# EAGLE board v02 (EAGLE 7.0.0)
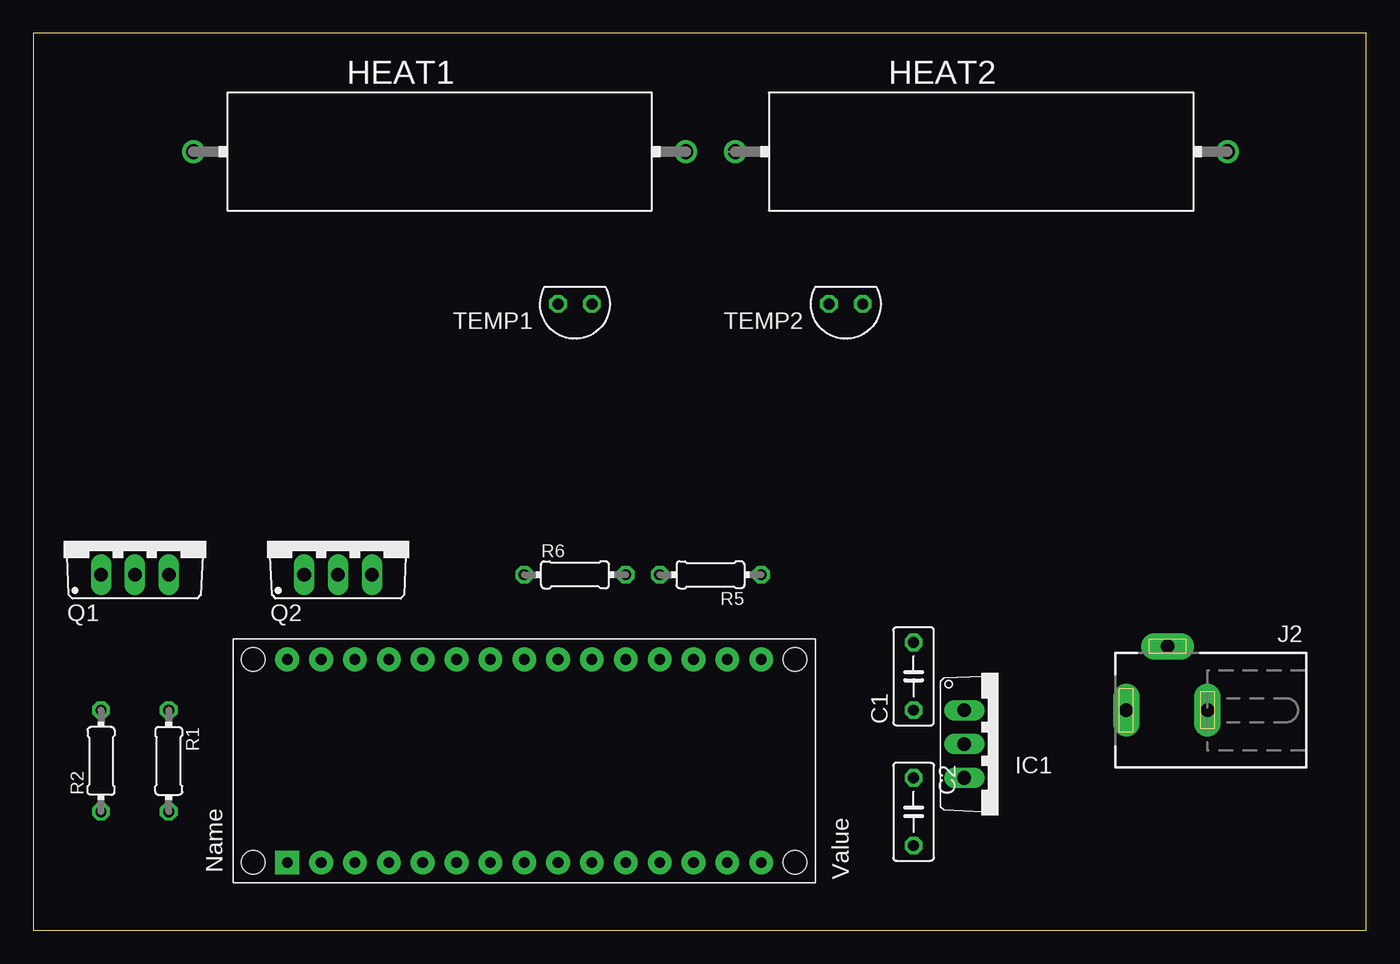
[diagram p0: board, top side]
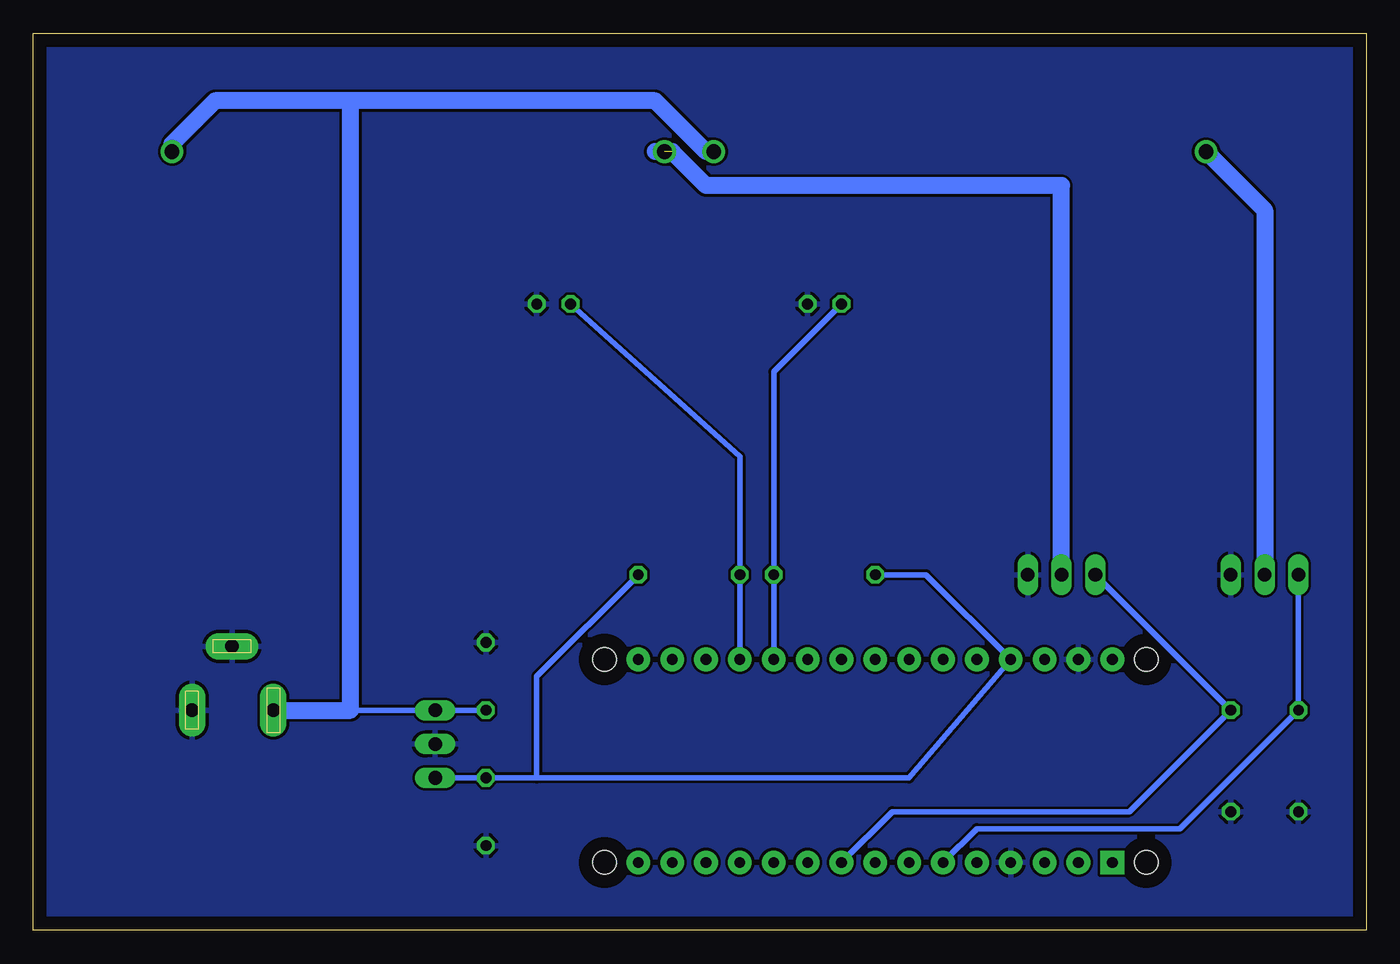
[diagram p1: board, bottom side, seen from below]

Size 100 x 67.3 mm. Coordinates in mm from the lower left corner, seen from the top.
Outline: 0,0 100,0 100,67.3 0,67.3 0,0
Copper layers (1*16): Top 0.035mm / dielectric 1.5mm / Bottom 0.035mm
Design rules "default": minimum track width 10mil, minimum drill 24mil, track to track 8mil, track to pad 8mil, pad to pad 8mil, via to via 8mil, smd to smd 8mil, copper to edge 40mil, drill to drill 8mil, minimum pad ring 10mil, minimum via ring 8mil, stop-mask expansion 4mil, vias tented up to drill 0mil, thermal gap 10mil
Net classes: 1 power: width 0.051 mm

## Footprints (pad centres in the part's own frame; a part is rotated, then mirrored left to right if it is on the bottom)
C050-030X075 = drill 0.813 octagon: 1 -2.54,0; 2 2.54,0
HPS932 = drill 1.1 pad 1.7: 1 -18.47,0; 2 18.47,0
TO220V = drill 1.016 long: 1 -2.54,-2.54; 2 0,-2.54; 3 2.54,-2.54
DCJ0303 = drill 1 pad 2 long: 1 0,3.1; 2 4.8,0; 3 0,-3
TO220BV = drill 1.016 long: D 0,-2.54; G -2.54,-2.54; S 2.54,-2.54
0204/7 = drill 0.813 octagon: 1 -3.81,0; 2 3.81,0
TO92H = drill 0.813 octagon: 1 -1.27,0; 2 1.27,0
PDIP-32 = drill 0.8 pad 1.778: 3V3 15.24,-35.56; +5V 15.24,-10.16; A0 15.24,-12.7; A1 15.24,-15.24; A2 15.24,-17.78; A3 15.24,-20.32; A4 15.24,-22.86; A5 15.24,-25.4; A6 15.24,-27.94; A7 15.24,-30.48; AREF 15.24,-33.02; D0/RX 0,-5.08; D2 0,-12.7; D3 0,-15.24; D4 0,-17.78; D5 0,-20.32; D6 0,-22.86; D7 0,-25.4; D8 0,-27.94; D9 0,-30.48; D10 0,-33.02; D11 0,-35.56; D12 0,-38.1; D13 15.24,-38.1; GND 0,-10.16; GND1 15.24,-5.08; RESET 0,-7.62; RESET1 15.24,-7.62; VIN 15.24,-2.54 | drill 0.8 pad 1.778 square: D1/TX 0,-2.54 | hole 1.778: 0,0; 0,-40.64; 15.24,-40.64; 15.24,0

## Placement (x,y rotation side)
C1  [C050-030X075]  66.04,19.05 90 top
C2  [C050-030X075]  66.04,8.89 270 top
HEAT1  10  [HPS932]  30.48,58.42 0 top
HEAT2  10  [HPS932]  71.12,58.42 0 top
IC1  7805TV  [TO220V]  72.39,13.97 270 top
J2  [DCJ0303]  85.09,16.51 90 top
Q1  IRF740  [TO220BV]  7.62,29.21 0 top
Q2  IRF740  [TO220BV]  22.86,29.21 0 top
R1  10K  [0204/7]  10.16,12.7 270 top
R2  10K  [0204/7]  5.08,12.7 90 top
R5  2K  [0204/7]  50.8,26.67 180 top
R6  2K  [0204/7]  40.64,26.67 0 top
TEMP1  LM335  [TO92H]  40.64,46.99 180 top
TEMP2  LM335  [TO92H]  60.96,46.99 180 top
U$1  [PDIP-32]  16.51,5.08 90 top

## Library data of the parts
C1 C2 R1 R2 R5 R6 = resistor
HEAT1 HEAT2 = resistor-power; OC_FARNELL: unknown; OC_NEWARK: unknown
IC1 = linear
J2 = con-jack; OC_FARNELL: unknown; OC_NEWARK: unknown
Q1 Q2 = transistor-power
TEMP1 TEMP2 = diode
U$1 = jet-lib

## Nets
+5V: C2.1 IC1.3 R5.1 R6.1 U$1.+5V
GND: C1.2 C2.2 IC1.2 J2.2 J2.3 Q1.S Q2.S R1.2 R2.1 TEMP1.1 TEMP2.1 U$1.GND U$1.GND1
H1: Q1.G R2.2 U$1.D3
H2: Q2.G R1.1 U$1.D6
N$6: HEAT1.1 Q1.D
N$9: HEAT2.1 Q2.D
T1: R6.2 TEMP1.2 U$1.A6
T2: R5.2 TEMP2.2 U$1.A7
V+: C1.1 HEAT1.2 HEAT2.2 IC1.1 J2.1

## Tracks (layer width: path | path; a pad name or v marks a point on that pad's centre or on a via)
+5V
  Bottom 0.406: 62.23,11.43 34.29,11.43 U$1.+5V 33.02,26.67 R6.1 | 62.23,11.43 C2.1 IC1.3 | R5.1 62.23,19.05 62.23,11.43
GND
  Bottom 0.406: 88.9,16.51 J2.3
  pour Bottom: -1.27,68.58 -1.27,-1.27 101.6,-1.27 101.6,68.58
H1
  Bottom 0.406: U$1.D3 29.21,7.62 13.97,7.62 R2.2 Q1.G
H2
  Bottom 0.406: U$1.D6 35.56,8.89 17.78,8.89 R1.1 Q2.G
N$6
  Bottom 1.27: HEAT1.1 7.62,54.03 Q1.D
N$9  (1 unrouted)
  Bottom 1.27: Q2.D 22.86,55.88 49.53,55.88 52.07,58.42 53.34,58.42
T1
  Bottom 0.406: U$1.A6 R6.2 44.45,41.91 TEMP1.2
T2
  Bottom 0.406: U$1.A7 R5.2 46.99,35.56 TEMP2.2
V+
  Bottom 0.406: C1.1 IC1.1 76.2,16.51
  Bottom 1.27: HEAT1.2 49.53,58.42 53.34,62.23 76.2,62.23 | 76.2,62.23 86.36,62.23 89.59,59 HEAT2.2 | J2.1 76.2,16.51 76.2,62.23